# Altium PCB AnalogControlBoard.PcbDoc
Units mm, origin at the board's own origin, x right, y up, seen from the top; angles counter-clockwise.
Board outline 90 x 160 mm, 2 copper layers (L1_Top, L14_Bot), stack 1.67 mm thick; 31 components, 23 nets, 89 pads, 0 vias.
Unrouted connection lines stored in the file: 61.
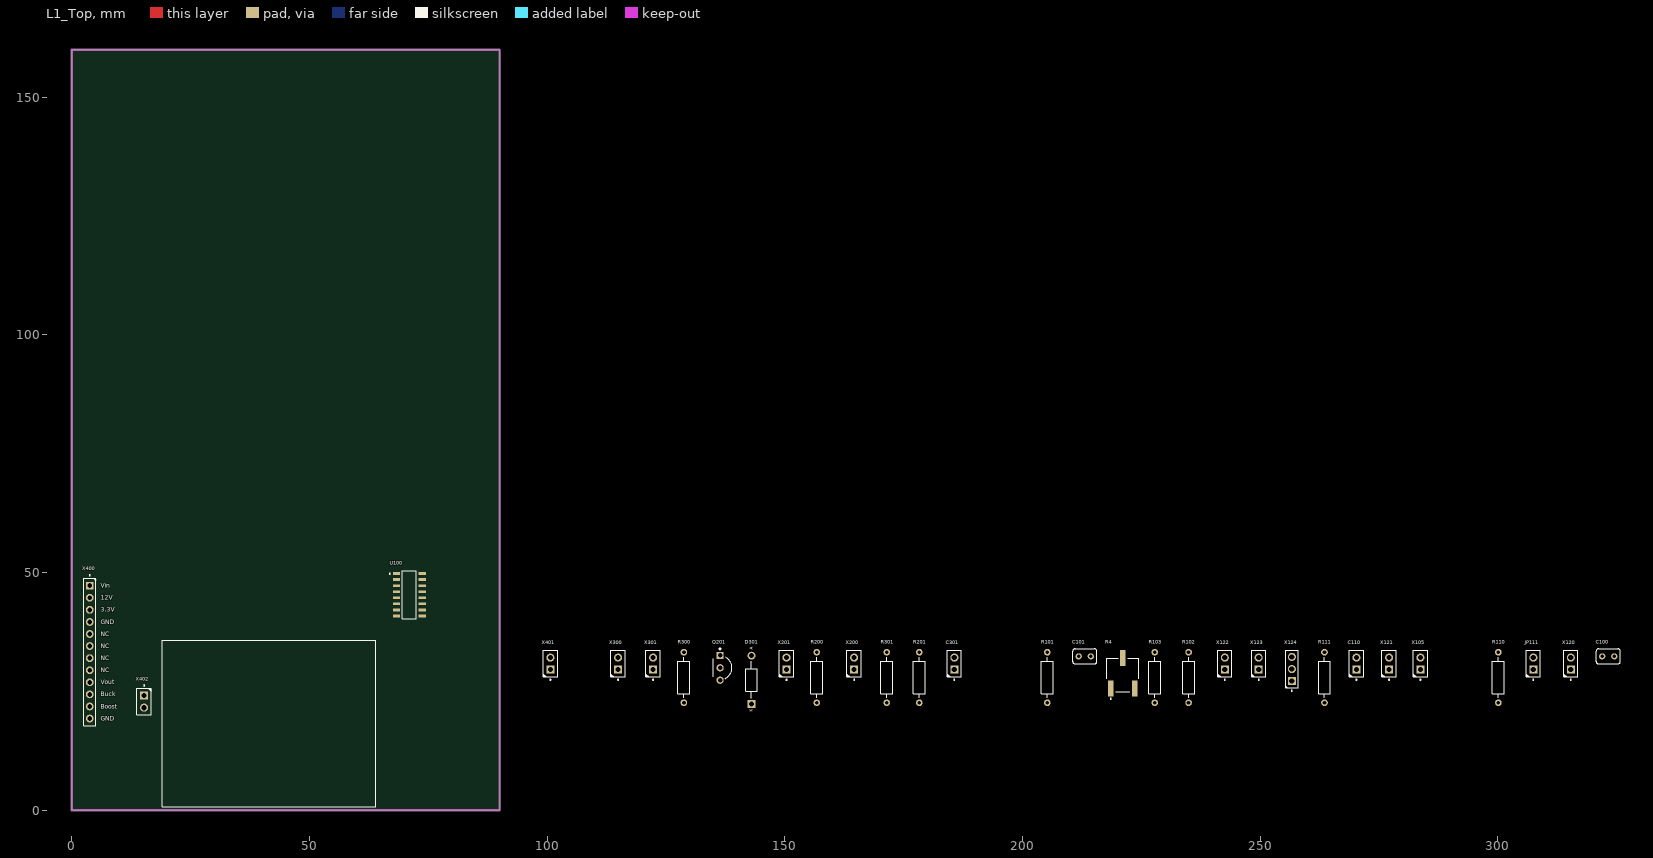
[diagram p0: L1_Top view]
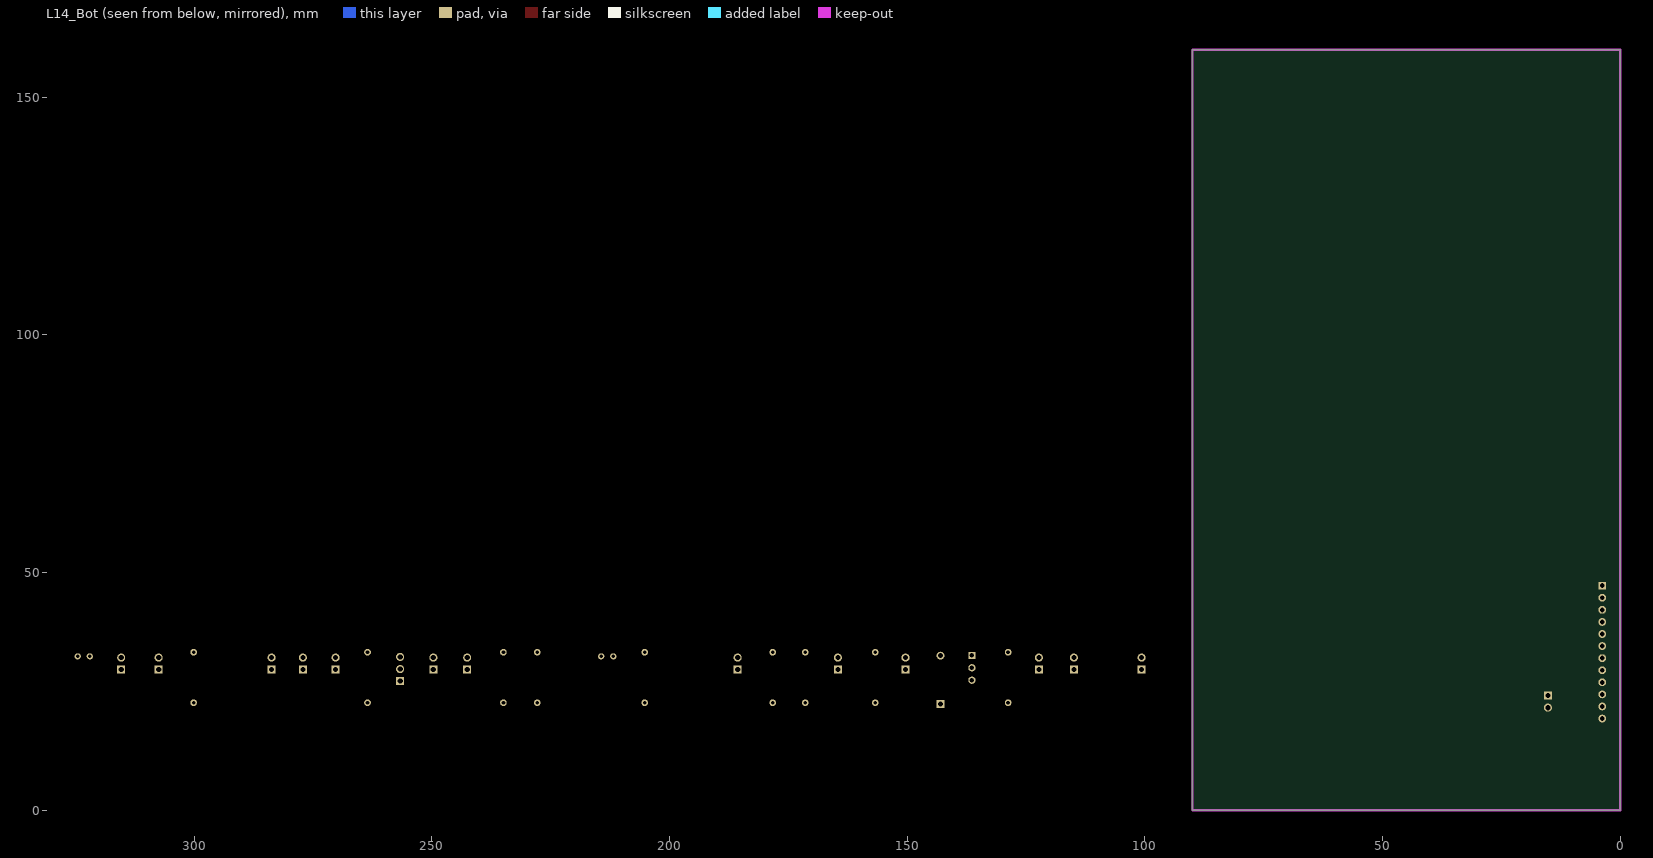
[diagram p1: L14_Bot view, seen from below]

## Layer stack, top to bottom
Top Solder: solder mask 0.02, Solder Resist, Dk 3.5
L1_Top: signal copper 0.035
Dielectric: prepreg 1.6, FR-4, Dk 4.3
L14_Bot: signal copper 0.035
Bottom Solder: solder mask 0.02, Solder Resist, Dk 3.5

## Board outline
0,0 90,0 90,160 0,160

## Design rules (kind name [scope] priority, off if disabled: settings)
Clearance Clearance_Fiducials [InComponentClass('Fiducials')] p1 off: gap=1 ignorepadtopadclearanceinfootprint=FALSE except(0: Arc-Hole Track-Hole SMDPad-Hole THPad-Hole Via-Hole Fill-Hole Poly-Hole Region-Hole Text-Hole)
Clearance Clearance_Edge_Fiducials [InComponentClass('Fiducials')] p2 off: gap=6 ignorepadtopadclearanceinfootprint=FALSE except(0: Arc-Hole Track-Hole SMDPad-Hole THPad-Hole Via-Hole Fill-Hole Poly-Hole Region-Hole Text-Hole) // Protel DXP Scope 2 Expression Was: IsBoardOutline
Clearance Clearance_All [All] p3: gap=0.2 ignorepadtopadclearanceinfootprint=FALSE // minimum Clearance on PCB
ComponentClearance ComponentClearance_All [All] p1: gap=0.2 collisioncheckmode=3 verticalgap=1 showdistances=FALSE
DiffPairsRouting DiffPairsRouting_Z0_DIFF_100R [InNetClass('Z0_DIFF_100R')] p1: maxlimit=0.2 minlimit=0.2 mostfreqgap=0.2 toplayer_minwidth=0.381 toplayer_maxwidth=0.381 toplayer_prefwidth=0.381 bottomlayer_minwidth=0.381 bottomlayer_maxwidth=0.381 bottomlayer_prefwidth=0.381 maxuncoupledlength=25
DiffPairsRouting DiffPairsRouting_All [All] p2: maxlimit=0.5 minlimit=0.12 mostfreqgap=0.15 toplayer_minwidth=0.381 toplayer_maxwidth=0.381 toplayer_prefwidth=0.381 bottomlayer_minwidth=0.381 bottomlayer_maxwidth=0.381 bottomlayer_prefwidth=0.381 maxuncoupledlength=25
FabricationTestPointUsage TestPointUsage [All] p1: valid=0 allowmultiple=FALSE
FabricationTestpoint Testpoint [All] p1: side=3 testpointundercomponent=TRUE minsize=1 maxsize=2.5 preferedsize=1.5 minholesize=0 maxholesize=1 preferedholesize=0.8 testpointgrid=0.025 allowsidetop=TRUE allowsidebottom=TRUE usegrid=TRUE gridtolerance=0
FanoutControl Fanout_LCC [All] p1 off: bgadir=Out bgaviamode=Centered fanoutstyle=Auto fanoutdirection=Alternating viagrid=0.025 // Protel DXP Scope 1 Expression Was: IsLCC   Fanout_LCC (Default Rule)
FanoutControl Fanout_BGA [All] p2 off: bgadir=Out bgaviamode=Centered fanoutstyle=Auto fanoutdirection=Alternating viagrid=0.025 // Protel DXP Scope 1 Expression Was: IsBGA   Fanout_BGA (Default Rule)
FanoutControl Fanout_SOIC [All] p3 off: bgadir=Out bgaviamode=Centered fanoutstyle=Auto fanoutdirection=Alternating viagrid=0.025 // Protel DXP Scope 1 Expression Was: IsSOIC   Fanout_SOIC (Default Rule)
FanoutControl Fanout_Default [All] p4: bgadir=Out bgaviamode=Centered fanoutstyle=Auto fanoutdirection=Alternating viagrid=0.025 // Fanout_Default (Default Rule)
FanoutControl Fanout_Small [All] p5 off: bgadir=Out bgaviamode=Centered fanoutstyle=Auto fanoutdirection=Alternating viagrid=0.025 // Protel DXP Scope 1 Expression Was: (CompPinCount < 5)   Fanout_Small (Default Rule)
Height Height_Top_In_Area [WithinRoom('Height_Top_Area')] p1: minheight=0 maxheight=8.4 prefheight=5.7 // Dedicated Height Constraint in Area
Height Height_Bot_No_Constraint [InComponentClass('Height_Bottom_exclude')] p2: minheight=0 maxheight=999 prefheight=12.7 // no max. Height constraint on Bottom Side
Height Height_Top_No_Constraint [InComponentClass('Height_Top_exclude')] p3: minheight=0 maxheight=999 prefheight=12.7 // no max. Height constraint on Top Side
Height Height_Bot [OnBottom] p4: minheight=0 maxheight=3 prefheight=2.5 // max. Component Height on PCB Bottom Side
Height Height_All [All] p5: minheight=0 maxheight=50 prefheight=12.7 // Default Component Height
HoleSize HoleSize_All [All] p1: absolutevalues=TRUE maxlimit=6.3 minlimit=0.3 maxpercent=80.000 minpercent=20.000
HoleToHoleClearance [All] p1: gap=0.25 allowstackedmicrovias=TRUE
Length Length_HighSpeed [InNetClass('HighSpeed')] p1: maxlimit=250 minlimit=0
Length Length_Default [InNetClass('TraceLength')] p2: maxlimit=500 minlimit=0 // min./max. Trace Length will be applied
MatchedLengths MatchedLengths_HighSpeed [InNetClass('HighSpeed')] p1: tolerance=25.4 checknetsindiffpair=FALSE checkdiffpairvsdiffpair=TRUE checkxsignals=TRUE checkothers=TRUE
MatchedLengths MatchedLengths_Default [InNetClass('MatchedLength')] p2: tolerance=100.5 checknetsindiffpair=TRUE checkdiffpairvsdiffpair=FALSE checkxsignals=FALSE checkothers=FALSE // Default Length Matching
MaxMinImpedance MaxMinImpedance_Z0_50R [InNetClass('Z0_50R')] p1: minimum=45,00 maximum=55,00 // Impedance Tolerance for 50 Ohms Traces
MaxMinImpedance MaxMinImpedance_All [All] p2: minimum=30,00 maximum=80,00 // Default Impedance Tolerance
MaximumViaCount MaximumViaCount_CLK [InNetClass('Clock')] p1: limit=10
MaximumViaCount MaximumViaCount_HighSpeed [InNetClass('HighSpeed')] p2: limit=10 // Max. Number of Vias in Net
MinimumAnnularRing MinimumAnnularRing_All [All] p1: minimumring=0.25
MinimumSolderMaskSliver [All] p1: minsoldermaskwidth=0.2
NetAntennae NetAntennae_High_Speed [InNetClass('HighSpeed')] p1: netantennaetolerance=3
NetAntennae NetAntennae_All [not InNet('<IGNORE DRC>')] p2: netantennaetolerance=10
ParallelSegment ParallelSegment_Broad_Default [InNetClass('XTalk_Broadside_Coupled') vs InNetClass('HighSpeed') Or InNetClass('XTalk_Broadside_Coupled') Or InNetClass('XTalk_Edge_Coupled')] p1: limit=15 gap=0.2 // Default Rule for Broadside-Coupled Traces
ParallelSegment ParallelSegment_Edge_Default [InNetClass('XTalk_Edge_Coupled') vs InNetClass('HighSpeed') Or InNetClass('XTalk_Broadside_Coupled') Or InNetClass('XTalk_Edge_Coupled')] p2: limit=15 gap=0.12 // Default Rule for Edge-Coupled Traces
ParallelSegment ParallelSegment_Default [InNetClass('HighSpeed') vs InNetClass('HighSpeed')] p3: limit=25 gap=0.12 // Max. Coupled Length for all High-Speed Signals
PlaneClearance PlaneClearance_HighVoltage [InNetClass('HighVoltage')] p1: clearance=0.5
PlaneClearance [All] p2: clearance=0.2
PlaneConnect PlaneConnect_All [All] p1: planeconnectstyle=Direct reliefexpansion=0.2 reliefentries=4 reliefconductorwidth=0.25 reliefairgap=0.2
PolygonConnect [HasFootprint('TO170P1500X450-6N-V')] p1: connectstyle=Direct reliefconductorwidth=0.254 reliefentries=4 polygonreliefangle="90 Angle" airgapwidth=0.254
PolygonConnect PolygonConnectVia [IsVia] p2: connectstyle=Direct reliefconductorwidth=0.254 reliefentries=4 polygonreliefangle="90 Angle" airgapwidth=0.254
PolygonConnect PolygonConnect_All [All] p3: connectstyle=Relief reliefconductorwidth=0.4 reliefentries=4 polygonreliefangle="90 Angle" airgapwidth=0.1 // Default Polygon Connection
RoutingCorners [All] p1: cornerstyle=45-Degree minsetback=2 maxsetback=2
RoutingTopology RoutingTopology_CLK [InNetClass('Clock')] p1: topology=Daisy_Balanced
RoutingTopology RoutingTopology_HighSpeed [InNetClass('HighSpeed')] p2: topology=Daisy_Simple
RoutingTopology RoutingTopology_All [All] p3: topology=Shortest
RoutingVias RoutingVias_HighCurrent [InNetClass('HighCurrent')] p1: holewidth=0.3 width=0.9 viastyle="Through Hole" minholewidth=0.3 minwidth=0.9 maxholewidth=0.4 maxwidth=0.9 // Via Size for High-Current Nets
RoutingVias RoutingVias_BGA_Fanout [WithinRoom('BGA_Fanout_Area')] p2: holewidth=0.2 width=0.48 viastyle="Through Hole" minholewidth=0.2 minwidth=0.48 maxholewidth=0.3 maxwidth=0.8 // Via Size for BGA Fanout Area
RoutingVias RoutingVias_PWR [All] p3: holewidth=0.3 width=0.8 viastyle="Through Hole" minholewidth=0.25 minwidth=0.8 maxholewidth=0.3 maxwidth=0.9 // Via size for Power and GND nets
RoutingVias RoutingVias_All [All] p4: holewidth=0.3 width=0.8 viastyle="Through Hole" minholewidth=0.3 minwidth=0.8 maxholewidth=0.3 maxwidth=0.8 // Default Via size
SilkToSilkClearance [All] p1: silktosilkclearance=0.15
SilkToSolderMaskClearance SilkscreenOverComponentPads [IsPad] p1: minsilkscreentomaskgap=0.2 clearancetoexposedcopper=TRUE
SolderMaskExpansion [All] p1: expansion=0.1 istentingtop=TRUE
StubLength StubLength_CLK [InNetClass('Clock')] p1: limit=25
StubLength StubLength_HighSpeed [InNetClass('HighSpeed')] p2: limit=30
SupplyNets SupplyNets_GND [InNet('GND')] p1: voltage=0,000
SupplyNets SupplyNets_12V [InNetClass('PWR_Supply_12V')] p2: voltage=12,00
SupplyNets SupplyNets_5V0 [InNetClass('PWR_Supply_5V0')] p3: voltage=5,000
SupplyNets SupplyNets_3V3 [InNetClass('PWR_Supply_3V3')] p4: voltage=3,000
SupplyNets SupplyNets_1V0 [InNetClass('PWR_Supply_1V0')] p5: voltage=1,000
UnRoutedNet [not InNet('<IGNORE DRC>')] p1:
Width Width_HighCurrent [All] p1 off: maxlimit=5 minlimit=0.3 preferedwidth=0.3 // Width for High-Current Traces
Width Width_BGA_Fanout [WithinRoom('BGA_Fanout_Area')] p2 off: maxlimit=1 minlimit=0.1 preferedwidth=0.1 // Trace Width for BGA Fanout Area
Width Width_Z0_DIFF_100R [InNetClass('Z0_DIFF_100R')] p3 off: maxlimit=0.12 minlimit=0.12 preferedwidth=0.12 minimp=50.000000 maximp=50.000000 favimp=50.000000
Width Width_Z0_50R [InNetClass('Z0_50R')] p4 off: maxlimit=0.16 minlimit=0.16 preferedwidth=0.16 minimp=50.000000 maximp=50.000000 favimp=50.000000
Width Width_PWR [InNetClass('Power')] p5 off: maxlimit=5 minlimit=0.2 preferedwidth=0.2 // Width for Power and GND nets
Width Width_All [not InNet('<IGNORE DRC>')] p6: maxlimit=10 minlimit=0.2 preferedwidth=0.2 minimp=50.000000 maximp=50.000000 favimp=50.000000 // minimum Width on PCB
9 further rules are at their usual default settings.

## Components (designator, comment, footprint, x,y, rotation, side; value= is the part's Value field where it differs from the comment)
C100 "100nF" CAPRR254W51L508T318H736B 323.213,32.383 r0 top
C101 "10nF" CAPRR254W51L508T318H736B 213.104,32.383 r0 top
C110 "61300211121" CON-M-THT-61300211121 270.254,30.859 r90 top
C301 "61300211121" CON-M-THT-61300211121 185.672,30.859 r90 top
D301 "1N4001-E3/54" DIOAD1020W78L465D235B 143,27.43 r90 top
JP111 "61300211121" CON-M-THT-61300211121 307.465,30.859 r90 top
Q201 "BS170" TO92-THT-2Nxxxx 136.396,29.97 r0 top
R4 "10k" POT-SMD-3361P 221.105,28.827 r90 top
R101 "680" RESAD1060W54L680D250B 205.23,27.938 r90 top
R102 "10k" RESAD1060W54L680D250B 234.948,27.938 r90 top
R103 "10k" RESAD1060W54L680D250B 227.836,27.938 r90 top
R110 "2k" RESAD1060W54L680D250B 300.099,27.938 r90 top
R111 "510" RESAD1060W54L680D250B 263.523,27.938 r90 top
R200 "470" RESAD1060W54L680D250B 156.716,27.938 r90 top
R201 "470" RESAD1060W54L680D250B 178.306,27.938 r90 top
R300 "1k" RESAD1060W54L680D250B 128.776,27.938 r90 top
R301 "1k" RESAD1060W54L680D250B 171.448,27.938 r90 top
U100 "TL494IDR" SOIC127P600X175-16N-2-V 71.026,45.339 r0 top
X105 "61300211121" CON-M-THT-61300211121 283.716,30.859 r90 top
X120 "61300211121" CON-M-THT-61300211121 315.339,30.859 r90 top
X121 "61300211121" CON-M-THT-61300211121 277.112,30.859 r90 top
X122 "61300211121" CON-M-THT-61300211121 242.568,30.859 r90 top
X123 "61300211121" CON-M-THT-61300211121 249.68,30.859 r90 top
X124 "61300311121" CON-M-THT-61300311121 256.665,29.716 r90 top
X200 "61300211121" CON-M-THT-61300211121 164.59,30.859 r90 top
X201 "61300211121" CON-M-THT-61300211121 150.366,30.859 r90 top
X300 "61300211121" CON-M-THT-61300211121 114.933,30.859 r90 top
X301 "61300211121" CON-M-THT-61300211121 122.299,30.859 r90 top
X400 "SSW-112-01-G-S" CON-F-THT-SSW-112-01-G-S 3.81,33.274 r270 top
X401 "61300211121" CON-M-THT-61300211121 100.709,30.859 r90 top
X402 "61300211121" CON-M-THT-61300211121 15.24,22.86 r270 top

## Footprints (in the part's own frame and the unit in brackets; to place one, negate y for a bottom-side part, rotate by r counter-clockwise, add the part's x,y. Pads: shape width x height; smd on the part's side, far side on the other; paste and mask are expansions set on the pad)
CAPRR254W51L508T318H736B [mm] "Capacitor,non-polarized,Radial,Rect. Body;2.54mm C X 0.51mm W 5.08mm L X 3.18mm T X 7.36mm H"
  round 1.3 hole 0.7 paste+0 mask+0: 1(-1.27,0) 2(1.27,0)
  silkscreen extent -2.55,-1.6 2.55,1.6, body extent -2.54,-1.59 2.54,1.59, height 7.36
CON-F-THT-SSW-112-01-G-S [mm] "Socket, THT; 2.54mm pitch, 12 pin, 30.99mm L X 2.41 mm W X 8.64 mm H body"
  rect 1.64x1.64 hole 1.04 paste+0 mask+0: 1(-13.97,0)
  round 1.64 hole 1.04 paste+0 mask+0: 2(-11.43,0) 3(-8.89,0) 4(-6.35,0) 5(-3.81,0) 6(-1.27,0) 7(1.27,0) 8(3.81,0) 9(6.35,0) 10(8.89,0) 11(11.43,0) 12(13.97,0)
  silkscreen extent -16.27,-1.3 15.5,1.3, body extent -15.5,-1.2 15.49,1.21, height 8.51
CON-M-THT-61300211121 [mm] "Header, Vertical, 2.54mm Pitch; 2 Pins, Single row, 5.08mm L X 2.54mm W X 8.89mm H body"
  rect 1.7x1.7 hole 1.1 paste+0 mask+0: 1(-1.27,0)
  round 1.7 hole 1.1 paste+0 mask+0: 2(1.27,0)
  silkscreen extent -3.52,-1.5 2.8,1.5, body extent -2.54,-1.27 2.54,1.27, height 8.54
CON-M-THT-61300311121 [mm] "Connector, THT; 2.54mm pitch, 7.62 mm L X 2.54 mm X 8.89 mm H body"
  rect 1.7x1.7 hole 1.1 paste+0 mask+0: 1(-2.54,0)
  round 1.7 hole 1.1 paste+0 mask+0: 2(0,0) 3(2.54,0)
  silkscreen extent -4.67,-1.3 3.9,1.3, body extent -3.81,-1.27 3.81,1.27, height 8.54
DIOAD1020W78L465D235B [mm] "Diode,Axial;10.20mm C X 0.785mm W 4.65mm L X 2.35mm Dia"
  rect 1.65x1.65 hole 1.05 paste+0 mask+0: 1(-5.1,0)
  round 1.65 hole 1.05 paste+0 mask+0: 2(5.1,0)
  silkscreen extent -3.9,-1.2 3.9,1.2, body extent -5.49,-1.36 5.49,1.36, height 2.71
POT-SMD-3361P [mm] "Potentiometer, SMD; 3 pin, 7.04 mm L X 6.71 mm W X 5.84 mm H Body"
  rect 3.3x1.19 smd paste+0 mask+0: 1(-3.2,2.54) 2(3.2,0) 3(-3.2,-2.54)
  silkscreen extent -5.52,-3.4 3.2,3.4, body extent -4.54,-3.35 3.99,3.35, height 5.23
RESAD1060W54L680D250B [mm] "Resistor,Axial;10.60mm C X 0.54mm W 6.80mm L X 2.50mm Dia"
  round 1.4 hole 0.8 paste+0 mask+0: 1(-5.3,0) 2(5.3,0)
  silkscreen extent -4.25,-1.25 4.25,1.25, body extent -5.57,-1.25 5.57,1.25, height 2.45
SOIC127P600X175-16N-2-V [mm] "SOIC,1.27mm pitch;16 pin,3.90mm W X 9.90mm L X 1.75mm H body"
  rect 1.55x0.6 smd paste-0.025 mask+0.07: 1(-2.7,4.445) 2(-2.7,3.175) 3(-2.7,1.905) 4(-2.7,0.635) 5(-2.7,-0.635) 6(-2.7,-1.905) 7(-2.7,-3.175) 8(-2.7,-4.445) 9(2.7,-4.445) 10(2.7,-3.175) 11(2.7,-1.905) 12(2.7,-0.635) 13(2.7,0.635) 14(2.7,1.905) 15(2.7,3.175) 16(2.7,4.445)
  silkscreen extent -4.22,-5 1.5,5, body extent -3,-4.95 3,4.95, height 1.6
TO92-THT-2Nxxxx [mm] "TO-92,2.6mm pitch;3 pin,4.825mm L X 3.685mm W X 9.33mm H body"
  rect 1.54x1.54 hole 0.94 paste+0 mask+0: 1(0,2.6)
  round 1.54 hole 0.94 paste+0 mask+0: 2(0,0) 3(0,-2.6)
  silkscreen extent -1.4,-2.26 2.5,4.15, body extent -1.34,-2.82 2.35,2.83, height 9.33

## Part data
C100 C101: library part 309824, "CAP / CERA / 100nF / 50V / 10% / X7R (EIA) / -55°C to 125°C / 2.54mm C X 0.51mm W 5.08mm L X 3.18mm T X 7.36mm H / - / -", Legacy PartNumber=CAP01010813, Manufacturer=Kemet, Package Description="Capacitor,non-polarized,Radial,Rect. Body;2.54mm C X 0.51mm W 5.08mm L X 3.18mm T X 7.36mm H", Supplier Part Number 1=1457655, Temperature max=125, Temperature min=-55, Temperature Range=Military, Tolerance Neg=10%, Voltage DC (max)=50V, Alternate View=Yes, Article Number=309824, Automotive Qualified=No, Combined Parameters="TC:X7R (EIA);Tol.:-10%/+10%;Vdc:50V", ComponentLink1Description="Vendor WebSite", ComponentLink1URL=http://www.kemet.com, ComponentLink2Description=Datasheet, ComponentLink2URL=http://webnetprod.muc.infineon.com/PCBPortal_Prod/WorkFlows/AltiumComponent/StandardDocumentation?Versionid=309825, ComponentStatus=Released, Legacy DeviceID=CAP01010813, Manufacturer Order Number=C320C104K5R5TA, Multiple Parts=No, PackageReference="Radial Type", Part Type=Capacitor, PLMStatus=Active, QuickPick="100nF / 50V / 10% / X7R (EIA) / Radial Type", ROHS Compliant=Y, Second Source allowed=Yes, Style=Single, Supplier 1=Farnell, Supplier 2=DigiKey, Supplier 3=Mouser, Supplier Part Number 2=399-4264-ND, Supplier Part Number 3=80-C320C104K5R, Symbol Type="Capacitor; Single; Standard; 2 Pins", Technology=Ceramic, Tolerance Pos=10%, Type=Standard, Version Number=V01
C110 C301 JP111 X105 X120 X121 X122 X123 X200 X201 X300 X301 X401 X402: library part 386760, "Header, 2.54mm Pitch, 2 pin, Vertical, Single Row", Legacy PartNumber=CON01500943, Manufacturer="Wurth Elektronik", Package Description="Header, Vertical, 2.54mm Pitch; 2 Pins, Single row, 5.08mm L X 2.54mm W X 8.89mm H body", Supplier Part Number 1=2356153, Temperature max=105, Temperature min=-40, Temperature Range=Industrial, Voltage DC (max)=na, Alternat View=Yes, Article Number=386760, Automotive Qualified=No, Combined Parameters="Board-to-Board Header (male);2x1;Mounting:THT;Orient:0° (vertical);Shielded:No", ComponentLink1Description="Vendor WebSite", ComponentLink1URL=http://www.we-online.com, ComponentLink2Description=Datasheet, ComponentLink2URL=http://webnetprod.muc.infineon.com/PCBPortal_Prod/WorkFlows/AltiumComponent/StandardDocumentation?Versionid=386761, ComponentStatus=Released, Legacy DeviceID=WE_61300211121, Manufacturer Order Number=61300211121, Part Type=Connector, PLMStatus=Active, QuickPick="0° (vertical) / Board-to-Board", ROHS Compliant=Y, Second Source allowed=Yes, Style=Strip, Supplier 1=Farnell, Supplier 2=DigiKey, Supplier 3=Mouser, Supplier Part Number 2=732-5315-ND, Supplier Part Number 3=710-61300211121, Type=Board-to-Board, Version Number=V01
D301: library part 395830, "General Purpose Plastic Rectifier, 1.0A/50Vrrm", Legacy PartNumber=DIO01300395, Manufacturer=Vishay, Package Description="Diode,Axial;10.20mm C X 0.785mm W 4.65mm L X 2.35mm Dia", Supplier Part Number 1=1836777, Temperature max=150, Temperature min=-50, Temperature Range=Automotive, Voltage DC (max)=na, Application=Standard, Article Number=395830, Automotive Qualified=No, Combined Parameters=Vf:1.1V;If:1A;Ur:50V;Ir:5uA;Pmax:-, ComponentLink1Description="Vendor WebSite", ComponentLink1URL=http://www.vishay.com, ComponentLink2Description=Datasheet, ComponentLink2URL=http://webnetprod.muc.infineon.com/PCBPortal_Prod/WorkFlows/AltiumComponent/StandardDocumentation?Versionid=395831, ComponentStatus=Released, Legacy DeviceID=DIO01300395, Manufacturer Order Number=1N4001-E3/54, PackageReference="DO-204AL (DO-41)", Part Type=Diode, PLMStatus=Active, QuickPick="Standard Diode / DO-204AL (DO-41)", ROHS Compliant=Y, Second Source allowed=Yes, Style=Single, Supplier 1=Farnell, Supplier 2=DigiKey, Supplier 3=Mouser, Supplier Part Number 2=1N4001-E3/54GITR-ND, Supplier Part Number 3=625-1N4001-E3/54, Symbol Type="Standard Diode Symbol, 2 Leads, 1 Cathode, 2 Anode", Type="Standard Diode", Version Number=V01
Q201: library part 439845, "N-Channel, Small Signal MOSFET, 500 mA, 60 Volts", Legacy PartNumber=TRA00100106, Manufacturer="ON Semiconductor", Package Description="TO-92,2.6mm pitch;3 pin,4.825mm L X 3.685mm W X 9.33mm H body", Supplier Part Number 1=1017687, Temperature max=150, Temperature min=-55, Temperature Range=Military, Voltage DC (max)=na, Application="Small Signal", Article Number=439845, Automotive Qualified=No, Combined Parameters="N-Channel Enhancement;Uds:60V;Id:500mA;Rds:1.8R;P:350mW", ComponentLink1Description="Vendor WebSite", ComponentLink1URL=http://onsemi.com/, ComponentLink2Description=Datasheet, ComponentLink2URL=http://webnetprod.muc.infineon.com/PCBPortal_Prod/WorkFlows/AltiumComponent/StandardDocumentation?Versionid=439846, ComponentStatus=Released, Legacy DeviceID=ONSEMI_BS170, Manufacturer Order Number=BS170, PackageReference="TO-92 (TO-226)", Part Type="Transistor FET", PLMStatus=Active, QuickPick="N-Channel Enhancement / 350mW / 500mA / 60V / TO-92 (TO-226)", ROHS Compliant=N, Second Source allowed=Yes, Style=Single, Supplier 1=Farnell, Supplier 2=DigiKey, Supplier 3=Mouser, Supplier Part Number 2=BS170-ND, Supplier Part Number 3=512-BS170, Symbol Type="Insulated-Gate Field-Effect Transistor (IGFET), N-Channel, Enhancement, Body Diode, Pin 1 Drain, 2 Gate, 3 Source, 3 Pins", Type="N-Channel Enhancement", Version Number=V01
R4: library part 630020, "RES / VAR / 10k / 500mW / 10% / 100ppm/K / -55°C to 125°C /  3 pin, 7.04 mm L X 6.71 mm W X 5.84 mm H Body / SMD / -", Manufacturer=Bourns, Package Description="Potentiometer, SMD; 3 pin, 7.04 mm L X 6.71 mm W X 5.84 mm H Body", Supplier Part Number 1=1696060, Temperature max=125, Temperature min=-55, Temperature Range=Military, Tolerance Neg=10%, Alternate View=Yes, Application=Standard, Article Number=630020, Automotive Qualified=No, Combined Parameters=TCR:100ppm/K;Tol.:-10%/+10%;Vdc:-;Idc:-;P:500mW, ComponentLink1Description="Vendor WebSite", ComponentLink1URL=http://www.bourns.com, ComponentLink2Description=Datasheet, ComponentLink2URL=http://webnetprod.muc.infineon.com/PCBPortal_Prod/WorkFlows/AltiumComponent/StandardDocumentation?Versionid=630021, ComponentStatus=Released, Manufacturer Order Number=3361P-1-103GLF, Multiple Parts=No, PackageReference=SMD, Part Type=Resistor, PLMStatus=Active, QuickPick="10k / 10% / 0.5 / SMD", ROHS Compliant=Y, Second Source allowed=Yes, Style=Single, Supplier 1=Farnell, Supplier 2=DigiKey, Supplier 3=Mouser, Supplier Part Number 2=3361P-103GLFCT-ND, Supplier Part Number 3=652-3361P-1-103GLF, Symbol Type="Resistor; Single; Variable; 3 Pins", Tolerance Pos=10%, Type=Variable, Version Number=V01
R101 R102 R103 R110 R111 R200 R201 R300 R301: library part 653345, "RES / STD / 10k / 250mW / 1% / 50ppm/K / - / 10.60mm C X 0.54mm W 6.80mm L X 2.50mm Dia / - / -", Manufacturer=Multicomp, Package Description="Resistor,Axial;10.60mm C X 0.54mm W 6.80mm L X 2.50mm Dia", Supplier Part Number 1=9341110, Temperature max=0, Temperature Range=Military, Tolerance Neg=1%, Voltage DC (max)=250V, Alternate View=Yes, Application=Standard, Article Number=653345, Automotive Qualified=No, Combined Parameters=TCR:50ppm/K;Tol.:-1%/+1%;Vdc:250V;Idc:-;P:250mW, ComponentLink1Description="Vendor WebSite", ComponentLink1URL=http://www.farnellinone.com, ComponentLink2Description=Datasheet, ComponentLink2URL=http://webnetprod.muc.infineon.com/PCBPortal_Prod/WorkFlows/AltiumComponent/StandardDocumentation?Versionid=653346, ComponentStatus=Released, Manufacturer Order Number="MF25 10K", Multiple Parts=No, PackageReference="Through Hole", Part Type=Resistor, PLMStatus=Active, QuickPick="10k / 1% / 0.25 / Through Hole", ROHS Compliant=N, Second Source allowed=Yes, Style=Single, Supplier 1=Farnell, Supplier 2=DigiKey, Supplier 3=Mouser, Symbol Type="Resistor; Single; Standard; 2 Pins", Technology="Metal Film", Temperature min=0, Tolerance Pos=1%, Type=Standard, Version Number=V00
U100: library part 646800, Manufacturer="Texas Instruments", Package Description="SOIC,1.27mm pitch;16 pin,3.90mm W X 9.90mm L X 1.75mm H body", Supplier Part Number 1=3008539, Temperature max=85, Temperature min=-40, Temperature Range=Industrial, Voltage DC (max)=na, Alternate View=No, Article Number=646800, Automotive Qualified=No, Combined Parameters="Switched Not applicable -;Vo:4.75V to 5.25V", ComponentLink1Description="Vendor WebSite", ComponentLink1URL=http://www.ti.com, ComponentLink2Description=Datasheet, ComponentLink2URL=http://webnetprod.muc.infineon.com/PCBPortal_Prod/WorkFlows/AltiumComponent/StandardDocumentation?Versionid=646801, ComponentStatus=Released, Legacy DeviceID=TI_TL494IDR, Manufacturer Order Number=TL494IDR, Multiple Parts=No, PackageReference="SOIC-16 (D)", Part Type="Power Supply", PLMStatus=Active, QuickPick="Switched / SOIC-16 (D)", ROHS Compliant=Y, Second Source allowed=Yes, Style="Not applicable", Supplier 1=Farnell, Supplier 2=DigiKey, Supplier 3=Mouser, Supplier Part Number 2=296-24387-1-ND, Supplier Part Number 3=595-TL494IDR, Symbol Type="Pulse-Width-Modulation Control Circuit", Type=Switched, Version Number=V01
X124: library part 633993, "WR-PHD Pin Header", Manufacturer="Wurth Elektronik", Package Description="Connector, THT; 2.54mm pitch, 7.62 mm L X 2.54 mm X 8.89 mm H body", Supplier Part Number 1=2356154, Temperature max=105, Temperature min=-40, Temperature Range=Industrial, Voltage DC (max)=na, Article Number=633993, Automotive Qualified=No, Combined Parameters="Board-to-Cable Header (male);3x1;Mounting:THT;Orient:0° (vertical);Shielded:No", ComponentLink1Description="Vendor WebSite", ComponentLink1URL=http://www.we-online.com, ComponentLink2Description=Datasheet, ComponentLink2URL=http://webnetprod.muc.infineon.com/PCBPortal_Prod/WorkFlows/AltiumComponent/StandardDocumentation?Versionid=633994, ComponentStatus=Released, Legacy DeviceID=WE_61300311121, Manufacturer Order Number=61300311121, PackageReference=THT, Part Type=Connector, PLMStatus=Active, QuickPick="0° (vertical) / Board-to-Cable", ROHS Compliant=Y, Second Source allowed=Yes, Style=Strip, Supplier 1=Farnell, Supplier 2=DigiKey, Supplier 3=Mouser, Supplier Part Number 2=732-5316-ND, Supplier Part Number 3=710-61300311121, Type=Board-to-Cable, Version Number=V01
X400: library part 653681, "Through Hole, .025 SQ Post Socket, Up to 8 Gbps performance, 4.7A current rating, 12Pins, 2.54mm Pitch, Vertical", Manufacturer=Samtec, Package Description="Socket, THT; 2.54mm pitch, 12 pin, 30.99mm L X 2.41 mm W X 8.64 mm H body", Supplier Part Number 1=1668381, Temperature max=125, Temperature min=-55, Temperature Range=Military, Voltage DC (max)=na, Article Number=653681, Automotive Qualified=No, Combined Parameters="Board-to-Board Socket (female);12x1;Mounting:THT;Orient:0° (vertical);Shielded:No", ComponentLink1Description="Vendor WebSite", ComponentLink1URL=http://www.samtec.com/, ComponentLink2Description=Datasheet, ComponentLink2URL=http://webnetprod.muc.infineon.com/PCBPortal_Prod/WorkFlows/AltiumComponent/StandardDocumentation?Versionid=653682, ComponentStatus=Released, Legacy DeviceID=SAM_SSW-112-01-G-S, Manufacturer Order Number=SSW-112-01-G-S, PackageReference=THT, Part Type=Connector, PLMStatus=Active, QuickPick="0° (vertical) / Board-to-Board", ROHS Compliant=Y, Second Source allowed=Yes, Style=Strip, Supplier 1=Farnell, Supplier 2=DigiKey, Supplier 3=Mouser, Supplier Part Number 2=SAM1209-12-ND, Supplier Part Number 3=200-SSW11201GS, Symbol Type="Socket 12 Pins", Type=Board-to-Board, Version Number=V00

## Nets (pads, with @x,y where several pads share a name; then routed paths per layer and width w, separated by ;. In a path a pad name is that pad's centre, name@x,y a point inside that pad or via, vN(x,y) a via of type N, cw(c..) or ccw(c..) an arc to the next point about the centre after c; other vN are vias at no path point)
3V3: R200.2 R201.2 X400.3 X401.1 X401.2
5V: R103.1 R110.2 U100.14 X105.1 X105.2
12V: C301.1 X400.2
Boost_Cntrl_Ext: X400.11 X402.2
Buck_Cntrl_Ext: X400.10 X402.1
Collector: R200.1 U100.8 U100.11 X200.1
Feedback: U100.3 X122.1 X122.2
GND: C100.2 C101.1 C110.2 Q201.3 R4.2 R101.1 R102.1 R111.1 R301.1 U100.4 U100.7 U100.9 U100.10 U100.13 X124.1 X124.2 X124.3 X400.4 X400.12
In+: JP111.2 U100.1
In-: U100.2 X121.1 X121.2
NetC101_2: C101.2 U100.5
NetC110_1: C110.1 JP111.1 R110.1 R111.2
NetC301_2: C301.2 D301.2 R301.2
NetD301_1: D301.1 R300.1 X301.1 X301.2
NetQ201_1: Q201.1 R201.1 X201.1 X201.2
NetQ201_2: Q201.2 X200.2
NetR4_1: R4.1 X123.1 X123.2
NetR101_2: R101.2 U100.6
NetR102_2: R102.2 U100.16
NetR103_2: R103.2 U100.15
NetR300_2: R300.2 X300.1 X300.2
Vin_VoltReg: C100.1 U100.12 X400.1
Vout: X120.1 X120.2 X400.9
pads on no net: R4.3 X400.5 X400.6 X400.7 X400.8

## Keep-outs
Keep-Out Layer:
  the board outline again, w0.5

## Silkscreen, mask and mechanical layers (free items; w line width, h text height)
Top Overlay:
  lines w0.254: 19.008,0.762 19.008,35.762 64.008,35.762 64.008,0.762 19.008,0.762
  text "Vin" at 6.096,46.482 h1.6
  text "12V" at 6.096,43.942 h1.6
  text "3.3V" at 6.096,41.402 h1.6
  text "GND" at 6.096,38.862 h1.6
  text "NC" at 6.096,36.322 h1.6
  text "NC" at 6.096,33.782 h1.6
  text "NC" at 6.096,31.242 h1.6
  text "NC" at 6.096,28.702 h1.6
  text "Vout" at 6.096,26.162 h1.6
  text "Buck" at 6.096,23.622 h1.6
  text "Boost" at 6.096,21.082 h1.6
  text "GND" at 6.096,18.542 h1.6
M3 (ASY_Text_Top):
  drawing of 12 lines, arcs and shapes, not listed
  text ".PRJ_Address1" at 292.608,-14.986 h3
  text ".PRJ_Title" at 292.354,-18.288 h4
  text ".PRJ_PCB_Revision" at 292.354,-21.336 h2
  text ".PRJ_Year" at 298.704,-21.336 h2
M5 (Sheet_Top):
  drawing of 56 lines, arcs and shapes, not listed
  text "1" at -5,214 h2
  text "2" at 45,214 h2
  text "3" at 95,214 h2
  text "4" at 145,214 h2
  text "5" at 195,214 h2
  text "6" at 245,214 h2
  text "7" at 295,214 h2
  text "8" at 345,214 h2
  text "A" at -28,182.5 h2
  text "A" at 367,182.5 h2
  text "B" at -28,112.5 h2
  text "B" at 367,112.5 h2
  text "C" at -28,42.5 h2
  text "C" at 367,42.5 h2
  text "ENGINEER:" at 251.97,-26.5 h1.2
  text "TITLE:" at 290.07,-26.5 h1.2
  text "D" at -28,-27.5 h2
  text "D" at 367,-27.5 h2
  text "PCB DESIGNER:" at 251.97,-34 h1.2
  text "Learning Platform for / Switching Regulators" at 291.7,-36.8 h3
  text ".PRJ_PCBDesigner" at 253,-38.5 h2
  text "DATE:" at 251.97,-41.5 h1.2
  text "PART NO.:" at 290.07,-41.5 h1.2
  text "REL:" at 340,-41.5 h1.2
  text "REV:" at 353,-41.5 h1.2
  text ".PRJ_Organization" at 209.164,-44.5 h2
  text ".PRINT_DATE" at 253,-45.5 h2
  text ".PRJ_PCB_Release" at 341,-45.5 h2
  text ".PRJ_PCB_Revision" at 354,-45.5 h2
  text ".PRJ_Address1" at 220,-47.5 h2
  text "SVN REVISION:" at 251.97,-49 h1.2
  text "FILE NAME:" at 290.07,-49 h1.2
  text "APRV:" at 340,-49 h1.2
  text "SCALE:" at 353,-49 h1.2
  text "Am Campeon 1-12" at 214.606,-50.5 h2
  text ".VersionControl_RevNumber" at 253,-52.5 h2
  text ".PCB_FILE_NAME_NO_PATH" at 291,-52.5 h2
  text ".PRJ_PCBApprovedBy" at 341,-52.5 h2
  text "1:1" at 356,-52.5 h2
  text "85579 NEUBIBERG - GERMANY" at 206.55,-53.5 h2
  text "C" at 251.3,-56.35 h0.9
  text ".PRJ_Copyright" at 253,-56.5 h1.2
  text "1" at -5,-61 h2
  text "2" at 45,-61 h2
  text "3" at 95,-61 h2
  text "4" at 145,-61 h2
  text "5" at 195,-61 h2
  text "6" at 245,-61 h2
  text "7" at 295,-61 h2
  text "8" at 345,-61 h2
M6 (Sheet_Bot):
  drawing of 56 lines, arcs and shapes, not listed
  text "8" at -5,214 h2
  text "7" at 45,214 h2
  text "6" at 95,214 h2
  text "5" at 145,214 h2
  text "4" at 195,214 h2
  text "3" at 245,214 h2
  text "2" at 295,214 h2
  text "1" at 345,214 h2
  text "A" at -27,182.5 h2
  text "A" at 368,182.5 h2
  text "B" at -27,112.5 h2
  text "B" at 368,112.5 h2
  text "C" at -27,42.5 h2
  text "C" at 368,42.5 h2
  text "TITLE:" at 49.93,-26.5 h1.2
  text "ENGINEER:" at 88.03,-26.5 h1.2
  text "D" at -27,-27.5 h2
  text "D" at 368,-27.5 h2
  text "PCB DESIGNER:" at 88.03,-34 h1.2
  text "Learning Platform for / Switching Regulators" at 48.3,-36.8 h3
  text ".PRJ_PCBDesigner" at 87,-38.5 h2
  text "REV:" at -13,-41.5 h1.2
  text "REL:" at 0,-41.5 h1.2
  text "PART NO.:" at 49.93,-41.5 h1.2
  text "DATE:" at 88.03,-41.5 h1.2
  text ".PRJ_Organization" at 130.836,-44.5 h2
  text ".PRJ_PCB_Revision" at -14,-45.5 h2
  text ".PRJ_PCB_Release" at -1,-45.5 h2
  text ".PRINT_DATE" at 87,-45.5 h2
  text ".PRJ_Address1" at 120,-47.5 h2
  text "SCALE:" at -13,-49 h1.2
  text "APRV:" at 0,-49 h1.2
  text "FILE NAME:" at 49.93,-49 h1.2
  text "SVN REVISION:" at 88.03,-49 h1.2
  text "Am Campeon 1-12" at 125.394,-50.5 h2
  text "1:1" at -16,-52.5 h2
  text ".PRJ_PCBApprovedBy" at -1,-52.5 h2
  text ".PCB_FILE_NAME_NO_PATH" at 49,-52.5 h2
  text ".VersionControl_RevNumber" at 87,-52.5 h2
  text "85579 NEUBIBERG - GERMANY" at 133.45,-53.5 h2
  text "C" at 88.7,-56.35 h0.9
  text ".PRJ_Copyright" at 87,-56.5 h1.2
  text "8" at -5,-61 h2
  text "7" at 45,-61 h2
  text "6" at 95,-61 h2
  text "5" at 145,-61 h2
  text "4" at 195,-61 h2
  text "3" at 245,-61 h2
  text "2" at 295,-61 h2
  text "1" at 345,-61 h2
M11 (Dimension_Top):
  the board outline again, w0.254
Drill Drawing:
  circle w0.2: c125.738,158.783 r0.5
  circle w0.2: c125.738,158.783 r0.833
  circle w0.2: c125.738,143.783 r0.833
  lines w0.2: 124.905,128.367 125.321,128.367 125.738,127.95 126.155,128.367 126.571,128.367 126.155,128.783 126.571,129.2 126.155,129.2 125.738,129.617 125.321,129.2 124.905,129.2 125.321,128.783 124.905,128.367 ; 124.905,132.533 125.738,131.7 126.571,132.533 125.738,133.367 124.905,132.533 ; 124.905,135.45 125.738,135.867 126.571,135.45 126.155,136.283 126.571,137.117 125.738,136.7 124.905,137.117 125.321,136.283 124.905,135.45 ; 124.905,139.2 126.571,139.2 126.571,140.867 124.905,140.867 124.905,139.2 ; 124.905,146.7 126.571,146.7 126.571,148.367 124.905,148.367 124.905,146.7 ; 124.905,152.117 126.571,152.117 125.738,150.45 124.905,152.117 ; 124.905,154.2 124.905,154.617 125.321,155.033 124.905,155.45 124.905,155.867 125.321,155.867 125.738,155.45 126.155,155.867 126.571,155.867 126.571,155.45 126.155,155.033 126.571,154.617 126.571,154.2 126.155,154.2 125.738,154.617 125.321,154.2 124.905,154.2 ; 125.238,147.033 126.238,147.033 126.238,148.033 125.238,148.033 125.238,147.033
  lines w0.381: 123.426,126.825 301.667,126.825 ; 123.426,160.575 301.667,160.575 ; 137.038,123.075 137.038,164.325 ; 151.934,123.075 151.934,164.325 ; 181.075,123.075 181.075,164.325 ; 193.562,123.075 193.562,164.325 ; 211.747,123.075 211.747,164.325 ; 241.328,123.075 241.328,164.325 ; 255.914,123.075 255.914,164.325 ; 274.399,123.075 274.399,164.325 ; 123.426,123.075 301.667,123.075 301.667,164.325 123.426,164.325 123.426,123.075
  text "Drill Legend" at 123.531,165.492 h6
  text "Symbol" at 125.676,161.7 h1.8
  text "Count" at 138.163,161.7 h1.8
  text "Hole Size" at 153.059,161.7 h1.8
  text "Plated" at 182.2,161.7 h1.8
  text "Hole Type" at 194.687,161.7 h1.8
  text "Drill Layer Pair" at 212.872,161.7 h1.8
  text "Via/Pad" at 242.453,161.7 h1.8
  text "Pad Shape" at 257.039,161.7 h1.8
  text "Template" at 275.524,161.7 h1.8
  text "814" at 138.163,157.95 h1.5
  text "0,300mm (11,81mil)" at 153.059,157.95 h1.5
  text "PTH" at 182.2,157.95 h1.5
  text "Round" at 194.687,157.95 h1.5
  text "L1_Top - L14_Bot" at 212.872,157.95 h1.5
  text "Via" at 242.453,157.95 h1.5
  text "Rounded" at 257.039,157.95 h1.5
  text "v80h30m0mx0" at 275.524,157.95 h1.5
  text "2" at 138.163,154.2 h1.5
  text "0,800mm (31,50mil)" at 153.059,154.2 h1.5
  text "PTH" at 182.2,154.2 h1.5
  text "Round" at 194.687,154.2 h1.5
  text "L1_Top - L14_Bot" at 212.872,154.2 h1.5
  text "Pad" at 242.453,154.2 h1.5
  text "(Mixed)" at 257.039,154.2 h1.5
  text "(Mixed)" at 275.524,154.2 h1.5
  text "32" at 138.163,150.45 h1.5
  text "0,850mm (33,47mil)" at 153.059,150.45 h1.5
  text "PTH" at 182.2,150.45 h1.5
  text "Round" at 194.687,150.45 h1.5
  text "L1_Top - L14_Bot" at 212.872,150.45 h1.5
  text "Pad" at 242.453,150.45 h1.5
  text "(Mixed)" at 257.039,150.45 h1.5
  text "(Mixed)" at 275.524,150.45 h1.5
  text "10" at 138.163,146.7 h1.5
  text "0,900mm (35,43mil)" at 153.059,146.7 h1.5
  text "NPTH" at 182.2,146.7 h1.5
  text "Round" at 194.687,146.7 h1.5
  text "L1_Top - L14_Bot" at 212.872,146.7 h1.5
  text "Pad" at 242.453,146.7 h1.5
  text "Rounded" at 257.039,146.7 h1.5
  text "c0hn90m-1p-1" at 275.524,146.7 h1.5
  text "85" at 138.163,142.95 h1.5
  text "1,100mm (43,31mil)" at 153.059,142.95 h1.5
  text "PTH" at 182.2,142.95 h1.5
  text "Round" at 194.687,142.95 h1.5
  text "L1_Top - L14_Bot" at 212.872,142.95 h1.5
  text "Pad" at 242.453,142.95 h1.5
  text "(Mixed)" at 257.039,142.95 h1.5
  text "(Mixed)" at 275.524,142.95 h1.5
  text "22" at 138.163,139.2 h1.5
  text "1,100mm (43,31mil)" at 153.059,139.2 h1.5
  text "PTH" at 182.2,139.2 h1.5
  text "Round" at 194.687,139.2 h1.5
  text "L1_Top - L14_Bot" at 212.872,139.2 h1.5
  text "Pad" at 242.453,139.2 h1.5
  text "(Mixed)" at 257.039,139.2 h1.5
  text "(Mixed)" at 275.524,139.2 h1.5
  text "7" at 138.163,135.45 h1.5
  text "1,600mm (62,99mil)" at 153.059,135.45 h1.5
  text "PTH" at 182.2,135.45 h1.5
  text "Round" at 194.687,135.45 h1.5
  text "L1_Top - L14_Bot" at 212.872,135.45 h1.5
  text "Pad" at 242.453,135.45 h1.5
  text "Rounded" at 257.039,135.45 h1.5
  text "c220h160m220p220" at 275.524,135.45 h1.5
  text "4" at 138.163,131.7 h1.5
  text "3,200mm (125,98mil)" at 153.059,131.7 h1.5
  text "NPTH" at 182.2,131.7 h1.5
  text "Round" at 194.687,131.7 h1.5
  text "L1_Top - L14_Bot" at 212.872,131.7 h1.5
  text "Pad" at 242.453,131.7 h1.5
  text "Rounded" at 257.039,131.7 h1.5
  text "c0hn320m-1p-1" at 275.524,131.7 h1.5
  text "4" at 138.163,127.95 h1.5
  text "5,360mm (211,02mil)" at 153.059,127.95 h1.5
  text "PTH" at 182.2,127.95 h1.5
  text "Round" at 194.687,127.95 h1.5
  text "L1_Top - L14_Bot" at 212.872,127.95 h1.5
  text "Pad" at 242.453,127.95 h1.5
  text "Rounded" at 257.039,127.95 h1.5
  text "c792h536m792p792" at 275.524,127.95 h1.5
  text "980 Total" at 138.163,124.2 h1.5
Mechanical 32:
  lines w0.02: 226.564,106.999 261.564,106.999 ; 237.064,82.199 237.064,86.199 ; 237.064,84.199 261.564,84.199 ; 237.064,86.699 237.064,90.699 ; 237.064,88.699 261.564,88.699 ; 237.064,91.199 237.064,95.199 ; 237.064,93.199 261.564,93.199 ; 238.564,109.499 238.564,111.499 ; 245.564,86.699 245.564,90.699 ; 245.564,91.199 245.564,95.199 ; 245.564,98.099 245.564,102.099 ; 245.564,106.999 245.564,108.999 ; 249.564,98.099 249.564,102.099 ; 250.564,109.499 250.564,111.499 ; 253.564,82.199 253.564,86.199 ; 253.564,86.699 253.564,90.699 ; 253.564,91.199 253.564,95.199 ; 253.564,95.699 253.564,97.699 ; 253.564,98.099 253.564,102.099 ; 253.564,104.999 253.564,108.999 ; 257.564,82.199 257.564,86.199 ; 257.564,86.699 257.564,90.699 ; 257.564,91.199 257.564,95.199 ; 257.564,95.699 257.564,97.699 ; 257.564,98.099 257.564,102.099 ; 257.564,102.599 257.564,104.599 ; 257.564,104.999 257.564,106.999 ; 226.564,82.199 226.564,86.199 261.564,86.199 261.564,82.199 226.564,82.199 ; 226.564,86.699 226.564,90.699 261.564,90.699 261.564,86.699 226.564,86.699 ; 226.564,91.199 226.564,95.199 261.564,95.199 261.564,91.199 226.564,91.199 ; 226.564,95.699 226.564,97.699 261.564,97.699 261.564,95.699 226.564,95.699 ; 226.564,98.099 226.564,102.099 261.564,102.099 261.564,98.099 226.564,98.099 ; 226.564,102.599 226.564,104.599 261.564,104.599 261.564,102.599 226.564,102.599 ; 226.564,104.999 226.564,108.999 261.564,108.999 261.564,104.999 226.564,104.999 ; 226.564,109.499 261.564,109.499 261.564,111.499 226.564,111.499 226.564,109.499
  lines w0.15: 123.184,81.636 ccw(c124.184,81.636) 124.184,80.636 216.535,80.636 ; 123.185,81.534 123.185,114.126 cw(c124.185,114.126) 124.185,115.126 216.535,115.126 ; 124.534,104.261 216.408,104.267 ; 124.534,107.281 216.281,107.315 ; 216.5,80.636 ccw(c216.5,81.636) 217.5,81.636 ; 216.501,115.126 cw(c216.501,114.126) 217.501,114.126 217.501,81.661
  lines w0.2: 225.564,82.199 ccw(c226.664,82.199) 226.664,81.099 ; 225.564,82.218 225.564,113.999 ; 225.564,113.899 cw(c226.664,113.899) 226.664,114.999 ; 226.564,81.099 261.564,81.099 ; 226.564,114.999 261.564,114.999 ; 227.064,110.499 237.564,110.499 ; 246.064,100.099 249.064,100.099 ; 250.064,100.099 253.064,100.099 ; 251.064,110.499 261.264,110.499 ; 254.064,107.999 261.064,107.999 ; 257.964,100.099 260.964,100.099 ; 258.052,83.199 261.052,83.199 ; 258.052,85.199 261.052,85.199 ; 258.059,87.722 261.059,87.722 ; 258.064,89.699 261.064,89.699 ; 258.064,92.199 261.064,92.199 ; 258.064,94.199 261.064,94.199 ; 258.064,96.699 261.064,96.699 ; 258.064,105.999 261.064,105.999 ; 261.464,81.099 ccw(c261.464,82.199) 262.564,82.199 ; 261.464,114.999 cw(c261.464,113.899) 262.564,113.899 ; 262.564,82.218 262.564,113.999 ; 271.888,113.249 285.388,113.249
  text "TECHNOLOGY" at 271.988,113.749 h1.3
  text "MATERIAL SPECIFICATION" at 230.064,112.499 h1.3
  text "TRACK WIDTH:" at 271.988,110.999 h1.1
  text "0.20mm" at 286.488,110.999 h1.1
  text "SINGLESIDED" at 227.064,109.999 h1
  text "DOUBLESIDED" at 239.314,109.999 h1
  text "MULTILAYER" at 251.564,109.999 h1
  text "CLEARANCE:" at 271.988,108.749 h1.1
  text "0.20mm" at 286.488,108.749 h1.1
  text "Layer Stack Up Detail for:  / .PRJ_Title .VariantName" at 124.459,107.945 h1.6
  text "MATERIAL" at 227.064,107.499 h1.1
  text "FR4" at 238.064,107.499 h1.1
  text "TG130" at 247.064,107.499 h1.1
  text "TG280" at 255.064,107.499 h1.1
  text "ANNULAR RING:" at 271.988,106.499 h1.1
  text "0.25mm" at 286.488,106.499 h1.1
  text "Layer" at 124.559,106.156 h0.7
  text "Gerber" at 139.237,106.156 h0.7
  text "Copper" at 149.535,106.156 h0.7
  text "Dielectric" at 160.992,106.156 h0.7
  text "Dielectric" at 172.894,106.156 h0.7
  text "YES" at 254.064,105.499 h1.1
  text "NO" at 258.564,105.499 h1.1
  text "RoHS conform" at 227.094,105.418 h1.1
  text "Name" at 124.559,104.756 h0.7
  text "Document" at 139.237,104.756 h0.7
  text "Thickness" at 149.535,104.756 h0.7
  text "Height" at 160.992,104.756 h0.7
  text "Material" at 172.894,104.756 h0.7
  text "HOLE SIZE:" at 271.988,104.249 h1.1
  text "0.300mm" at 286.488,104.249 h1.1
  text "PCB THICKNESS mm" at 227.064,103.099 h1.1
  text "1.6" at 258.294,103.018 h1.1
  text "Top Overlay" at 124.609,102.086 h1
  text "(.GTO)" at 139.287,102.086 h1
  text "COPPER THICKNESS" at 227.064,100.599 h1.1
  text "9" at 247.064,99.599 h1.1
  text "18" at 250.564,99.599 h1.1
  text "35" at 254.564,99.599 h1.1
  text "70" at 258.564,99.599 h1.1
  text "AFTER PLATING um" at 227.064,98.599 h1.1
  text "Top Solder" at 124.609,98.086 h1
  text "(.GTS)" at 139.287,98.086 h1
  text "THROUGH PLATED BOARD" at 227.064,96.199 h1.1
  text "YES" at 254.064,96.199 h1.1
  text "NO" at 258.564,96.199 h1.1
  text "L1_Top" at 124.609,94.086 h1
  text "(.GTL)" at 139.287,94.086 h1
  text "0.035mm" at 149.585,94.086 h1
  text "SOLDER" at 227.064,93.699 h1.1
  text "RED" at 238.564,93.699 h1.1
  text "TOP" at 248.064,93.699 h1.1
  text "YES" at 254.064,93.699 h1.1
  text "NO" at 258.564,93.699 h1.1
  text "1.6mm" at 161.042,92.086 h1
  text "FR-4" at 172.893,92.086 h1
  text "MASK" at 227.064,91.699 h1.1
  text "RED" at 238.564,91.699 h1.1
  text "BOT" at 248.064,91.699 h1.1
  text "YES" at 254.064,91.699 h1.1
  text "NO" at 258.564,91.699 h1.1
  text "L2_Bot" at 124.609,90.162 h1
  text "(.GBL)" at 139.287,90.162 h1
  text "0.035mm" at 149.585,90.086 h1
  text "SILK-" at 227.064,89.199 h1.1
  text "WHITE" at 238.564,89.199 h1.1
  text "TOP" at 248.064,89.199 h1.1
  text "YES" at 254.064,89.199 h1.1
  text "NO" at 258.564,89.199 h1.1
  text "SCREEN" at 227.064,87.199 h1.1
  text "WHITE" at 238.564,87.199 h1.1
  text "BOT" at 248.064,87.199 h1.1
  text "YES" at 254.064,87.199 h1.1
  text "NO" at 258.564,87.199 h1.1
  text "Bottom Solder" at 124.609,86.086 h1
  text "(.GBS)" at 139.286,86.086 h1
  text "ELECTRICAL" at 241.064,84.699 h1.1
  text "YES" at 254.064,84.699 h1.1
  text "NO" at 258.564,84.699 h1.1
  text "TEST" at 227.064,83.699 h1.1
  text "AOI" at 244.564,82.699 h1.1
  text "YES" at 254.064,82.699 h1.1
  text "NO" at 258.564,82.699 h1.1
  text "Bottom Overlay" at 124.609,82.086 h1
  text "(.GBO)" at 139.287,82.086 h1

## Dimensions
0,0 to 0,160 on M11 (Dimension_Top)
0,0 to 90,0 on M11 (Dimension_Top)

## Text inside footprints (layer, text, board x,y; h text height)
D301: Top Overlay "A" at 143.3,33.755 h0.6 r90; Top Overlay "K" at 143.279,20.705 h0.6 r90; M13 (CMP_Body_OTL_Top) "K" at 143.254,25.373 h0.6 r90; M13 (CMP_Body_OTL_Top) "A" at 143.305,28.878 h0.6 r90